# Altium PCB pcb.PcbDoc
Units mil, origin at the board's own origin, x right, y up, seen from the top; angles counter-clockwise.
Board outline 950 x 800 mil, 2 copper layers (Top Layer, Bottom Layer); 25 components, 17 nets, 75 pads, 0 vias.
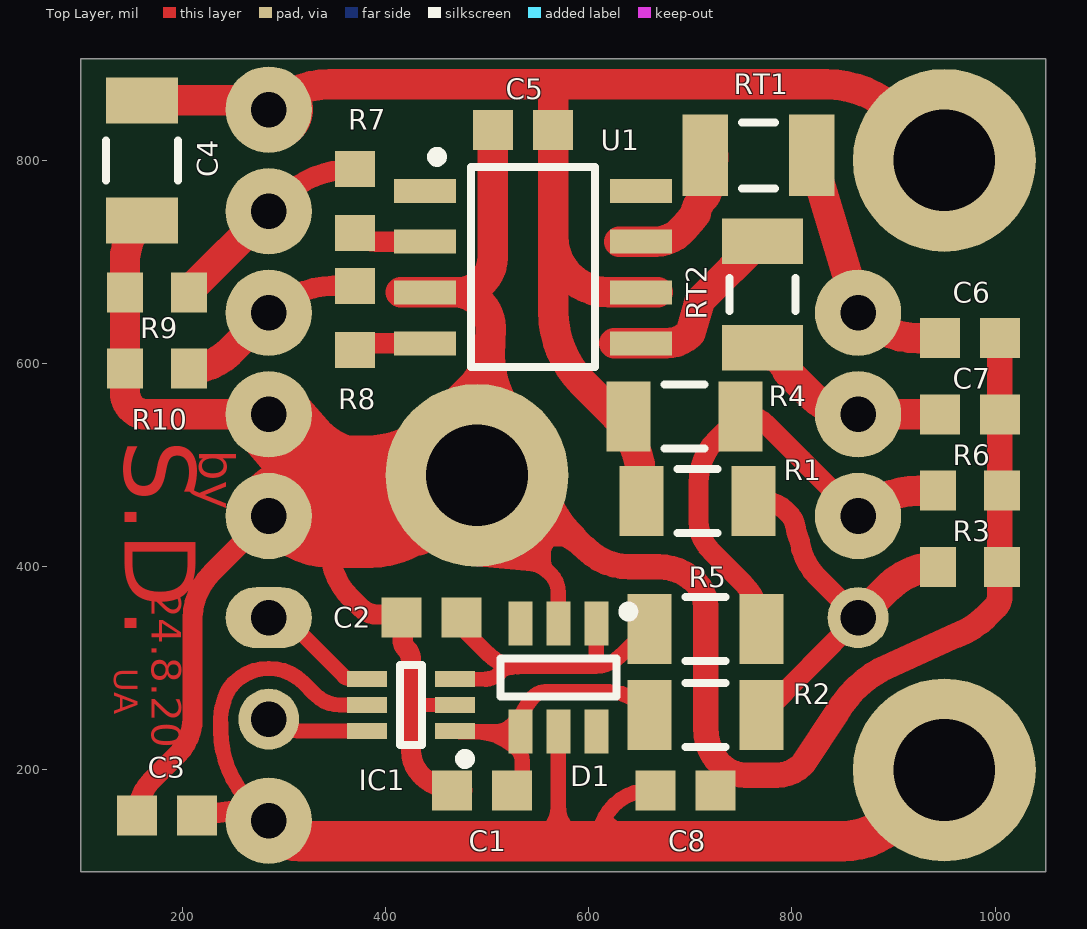
[diagram p0: Top Layer view]
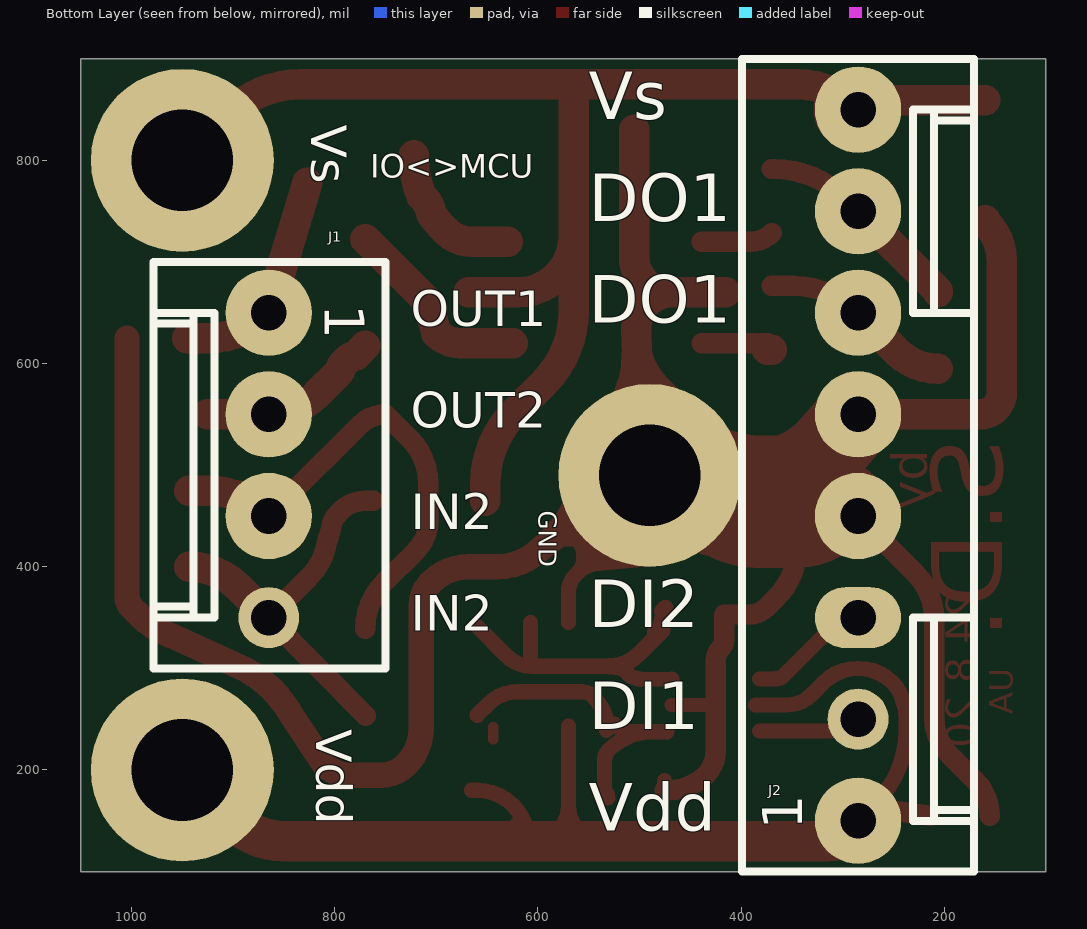
[diagram p1: Bottom Layer view, seen from below]
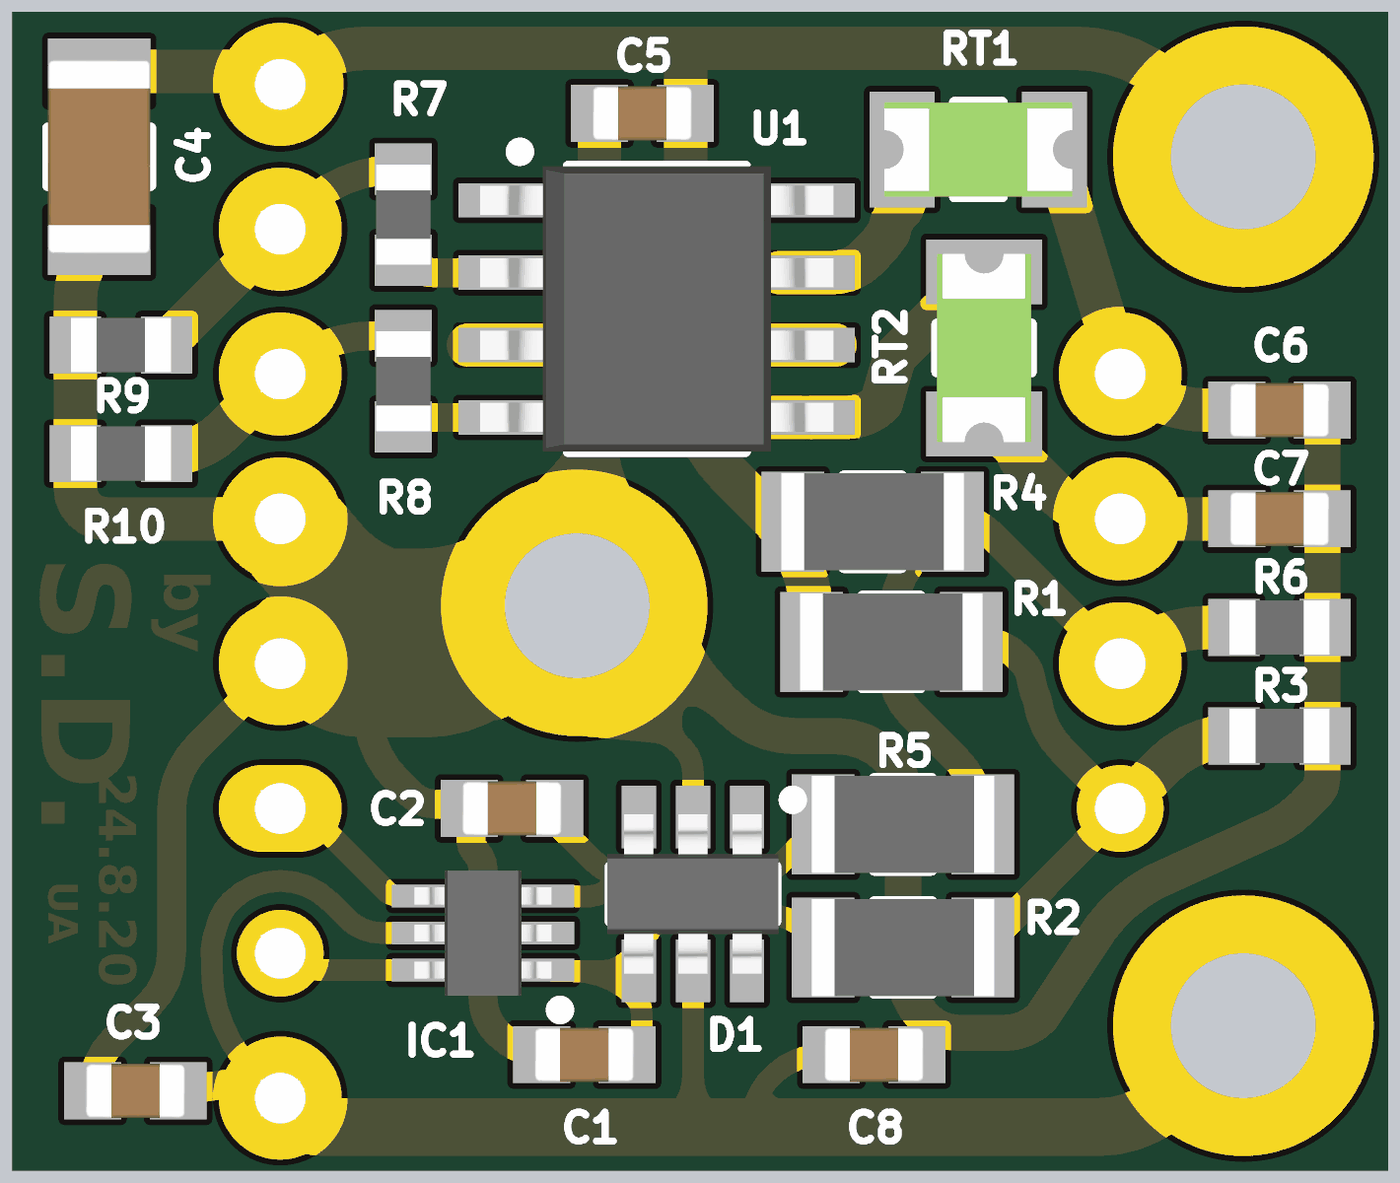
[diagram p2: 3D render of the assembled board from above, using the file's embedded part models]

## Layer stack, top to bottom
Top Solder: solder mask 0.4, Solder Resist, Dk 3.5
Top Layer: signal copper 1.4
Dielectric 1: dielectric 12.6, FR-4, Dk 4.8
Bottom Layer: signal copper 1.4
Bottom Solder: solder mask 0.4, Solder Resist, Dk 3.5

## Board outline
100,100 100,900 1050,900 1050,100

## Design rules (kind name [scope] priority, off if disabled: settings)
Clearance [All] p1: gap=10 ignorepadtopadclearanceinfootprint=FALSE except(9: Arc-SMDPad Track-SMDPad SMDPad-SMDPad)
PolygonConnect [All] p1: connectstyle=Relief reliefconductorwidth=10 reliefentries=4 polygonreliefangle="90 Angle" airgapwidth=10
RoutingVias [All] p1: holewidth=28 width=50 viastyle="Through Hole" minholewidth=28 minwidth=50 maxholewidth=28 maxwidth=50
SolderMaskExpansion [All] p1: expansion=4 istentingtop=FALSE
Width [All] p1: maxlimit=1000 minlimit=10 preferedwidth=10 minimp=50.000000 maximp=50.000000 favimp=50.000000
30 further rules are at their usual default settings.

## Components (designator, comment, footprint, x,y, rotation, side; value= is the part's Value field where it differs from the comment)
C1 "10n" CAPC1608X85N 495,180 r0 top
C2 "10n" CAPC1608X85N 445,350 r0 top
C3 "100n" CAPC1608X85N 185,155 r0 top
C4 "22u" CAPC3216X140N 160,800 r90 top
C5 "100n" CAPC1608X85N 535,830 r0 top
C6 "10n" CAPC1608X85N 975,625 r0 top
C7 "10n" CAPC1608X85N 975,550 r180 top
C8 "100n" CAPC1608X85N 695,180 r180 top
D1 "SRV05-4" SOT95P280X110-6N 570,291 r270 top
IC1 "" SOT65P220X110-6N 425,264 r180 top
J1 "" MOLEX_22-27-2041 865,500 r270 bottom
J2 "" MOLEX_22-27-2081 285,500 r90 bottom
R1 "2k2" RESC3116X65N 707,465 r180 top
R2 "6.8k" RESC3116X65N 715,254 r180 top
R3 "" RESC1608X55N 975,400 r180 top
R4 "2k2" RESC3116X65N 694,548 r180 top
R5 "6.8k" RESC3116X65N 715,339 r180 top
R6 "" RESC1608X55N 975,475 r180 top
R7 "100" RESC1608X55N 370,760 r270 top
R8 "100" RESC1608X55N 370,645 r270 top
R9 "1k" RESC1608X55N 175,670 r0 top
R10 "1k" RESC1608X55N 175,595 r0 top
RT1 "=Value" FUSC_LITTELFUSE_466 767,805 r0 top
RT2 "=Value" FUSC_LITTELFUSE_466 771,668 r270 top
U1 "IR4427STRPBF" SOIC127P600X175-8N 545,695 r0 top

## Footprints (in the part's own frame and the unit in brackets; to place one, negate y for a bottom-side part, rotate by r counter-clockwise, add the part's x,y. Pads: shape width x height; smd on the part's side, far side on the other; paste and mask are expansions set on the pad)
CAPC1608X85N [mm] "Chip Capacitor, Body 1.6x0.8mm IPC Medium Density"
  rect 1x1 smd: 1(-0.75,0) 2(0.75,0)
  body extent -0.87,-0.47 0.88,0.48, height 0.85
CAPC3216X140N [mm] "Chip Capacitor, Body 3.2x1.6mm, IPC Medium Density"
  rect 1.15x1.8 smd: 1(-1.5,0) 2(1.5,0)
  silkscreen extent -0.5,-0.9 0.5,0.9, body extent -1.7,-0.9 1.7,0.9, height 1.4
FUSC_LITTELFUSE_466 [mm] "Very Fast-Acting Surface Mount Thin Film Fuse, Size 1206, Serie 466"
  rect 1.14x2.03 smd: 1(-1.335,0) 2(1.335,0)
  silkscreen extent -0.41,-0.83 0.42,0.83, body extent -1.65,-0.83 1.65,0.83, height 0.66
MOLEX_22-27-2041 [mil] "2.54mm (.100\") Pitch KK® Header, Single Row, Vertical, 4 Circuits"
  round 85 hole 35: 1(-150,0) 2(-50,0) 3(50,0)
  round 60 hole 35: 4(150,0)
  silkscreen extent -200,-113 200,115, body extent -200,-113 200,115, height 461
MOLEX_22-27-2081 [mil] "2.54mm (.100\") Pitch KK® Header, Single Row, Vertical, 8 Circuits"
  round 85 hole 35: 1(-350,0) 4(-50,0) 5(50,0) 6(150,0) 7(250,0) 8(350,0)
  round 60 hole 35: 2(-250,0)
  oval 60x85 hole 35: 3(-150,0)
  silkscreen extent -400,-114 400,114, body extent -400,-114 400,114, height 461
RESC1608X55N [mm] "Chip Resistor, EIA 0603, Metric 1608, Body 1.6x0.8mm, IPC Medium Density"
  rect 0.9x1 smd: 1(-0.8,0) 2(0.8,0)
  body extent -0.87,-0.47 0.88,0.48, height 0.55
RESC3116X65N [mm] "Chip Resistor, EIA 1206, Metric 3116, Body 3.1x1.55mm, IPC Medium Density"
  rect 1.1x1.75 smd: 1(-1.4,0) 2(1.4,0)
  silkscreen extent -0.5,-0.8 0.5,0.8, body extent -1.6,-0.85 1.6,0.85, height 0.65
SOIC127P600X175-8N [mm] "SOIC 8, Pitch 1.27mm - Body 4x5mm, IPC Medium Density"
  rect 1.55x0.6 smd: 1(-2.7,1.905) 2(-2.7,0.635) 3(-2.7,-0.635) 4(-2.7,-1.905) 5(2.7,-1.905) 6(2.7,-0.635) 7(2.7,0.635) 8(2.7,1.905)
  silkscreen extent -2.52,-2.5 1.55,2.88, body extent -3.1,-2.5 3.1,2.5, height 1.75
SOT65P220X110-6N [mm] "SOT363, 0.65mm pitch; 6 pin, 1.25mm W X 2mm L, IPC Medium Density"
  rect 1x0.4 smd: 1(-1.1,0.65) 2(-1.1,0) 3(-1.1,-0.65) 4(1.1,-0.65) 5(1.1,0) 6(1.1,0.65)
  silkscreen extent -1.48,-1 0.28,1.47, body extent -1.2,-1.1 1.2,1.1, height 1.1
SOT95P280X110-6N [mm] "SOT, 0.95mm Pitch; 6 Pin, 1.60mm W X 2.90mm L X 1.10mm H Body, IPC Medium Density"
  rect 1.1x0.6 smd: 1(-1.35,0.95) 2(-1.35,0) 3(-1.35,-0.95) 4(1.35,-0.95) 5(1.35,0) 6(1.35,0.95)
  silkscreen extent -1.77,-1.45 0.48,1.88, body extent -1.4,-1.5 1.4,1.5, height 1.1

## Part data
C1 C2 C3 C4 C5 C6 C7 C8: library part "Capacitor - non polarized", "Non-polarised capacitor"
D1: "RailClamps Low Capacitance TVS Diode Array", Device=SRV05-4
IC1: library part 742G17, "Dual Schmitt-Trigger Buffer"
J1: library part "Connector 4 Male", "Connector 4 Male"
J2: library part "Connector 8 Male", "Connector 8 Male"
R1 R2 R3 R4 R5 R6 R7 R8 R9 R10: library part Resistor, "Resistor"
RT1 RT2: library part "Thermistor PTC", "Thermistor NTC (Positive Temperature Coefficient)"

## Free pads (board coordinates)
  round 180 hole 100: ""(490,490) ""(950,200) ""(950,800)

## Nets (pads, with @x,y where several pads share a name; then routed paths per layer and width w, separated by ;. In a path a pad name is that pad's centre, name@x,y a point inside that pad or via, vN(x,y) a via of type N, cw(c..) or ccw(c..) an arc to the next point about the centre after c; other vN are vias at no path point)
_do1: R7.2 U1.2 | length 71
  Top Layer w20: R7.2 ccw(c390.53,749.03) 390.53,720 U1.2
_do2: R8.2 U1.4 | length 84.1
  Top Layer w20: R8.2 cw(c385.68,597.82) R8.2@375.77,617.66 ; R8.2@375,615 cw(c380,615) R8.2@375.77,617.66 ; R8.2@380,620 ccw(c380,615) R8.2@375.77,617.66 ; U1.4 385.68,620 ccw(c385.68,597.82) R8.2@375.77,617.66
  Top Layer w30: R8.2 373.5,613.5 ccw(c373.5,615) R8.2@375,615
_in1: C1.2 D1.4 IC1.1 R2.2 | length 322.4
  Top Layer w10: R2.2@644,230 R2.2@644,242.31
  Top Layer w15: IC1.1@473.15,237.6 IC1.1@487.51,237.6 ; D1.4@525,245 cw(c507.13,262.87) 507.13,237.6 IC1.1@487.51,237.6 ; C1.2@531.41,172.47 cw(c542.06,172.47) 534.53,180 534.53,209.07 ccw(c519.07,209.07) 530,220 ccw(c487.51,177.51) IC1.1@487.51,237.6 ; D1.4@531.6,240.06 cw(c573.94,240.06) 543.07,269.04 cw(c557.19,260.5) 543.8,270.14 cw(c557.19,260.5) 557.19,277 ; D1.4@532.6,238.85 D1.4@532.6,240.06 ; 558.19,277 619.21,277 cw(c619.21,260.5) 619.84,276.99 cw(c619.21,260.5) 620.01,276.98 620.11,276.98 cw(c620.11,236.43) 648.78,265.1 R2.2
_in2: C2.2 D1.1 IC1.3 R5.2 | length 341.5
  Top Layer w10: R5.2@658.63,339 R5.2
  Top Layer w15: IC1.3 498.88,289.18 ; 498.94,289.59 ccw(c498.94,308.06) 512,295 ; 512,296 cw(c524.08,283.92) 524.08,301 ; 530.08,302 606.53,302 ccw(c606,337.31) 630.97,312.34 R5.2@659.63,341 ; 607.4,304.52 D1.1@607.4,345.15
  Top Layer w16: C2.2 cw(c481.32,350) 476.52,354.8 ccw(c503.84,354.8) C2.2@484.52,335.48 ; C2.2@474.53,359.47 C2.2@477.86,356.14 ; C2.2@477.52,337.48 500.92,314.08 ccw(c530.08,343.25) 530.08,302
_out1: RT1.1 U1.7 | length 147.3
  Top Layer w30: U1.7@630,720 665.86,720 ccw(c665.86,754.14) 690,730 693.15,733.15 ccw(c622.44,803.86) 705.19,747.71 cw(c730.04,745) 714.35,764.47 ccw(c622.44,803.86) 722.44,803.86 RT1.1@722.44,805
_out2: RT2.1 U1.5 | length 196.7
  Top Layer w30: U1.5@625,620 U1.5 675.86,620 ccw(c675.86,654.14) 700,630 709.21,661.77 709.28,661.84 RT2.1@770,722.56
DI1: IC1.6 J2.2 | length 113.8
  Top Layer w15: J2.2 ccw(c312.98,277.98) 312.98,238.41 IC1.6
  Top Layer w20: J2.2 cw(c315.42,219.58) J2.2@296.32,258.13
DI2: IC1.4 J2.3 | length 147.6
  Top Layer w15: J2.3 cw(c285,310.92) 312.63,338.55 359.42,291.77 ccw(c367.2,304.59) 367.2,289.59 IC1.4 ; J2.3@297.43,337.57 J2.3@304.45,330.55
  Top Layer w20: J2.3 ccw(c315.42,380.41) 285.05,349.95 ccw(c315.42,380.41) J2.3@300.09,340.23
DO1: J2.7 R7.1 R9.2 | length 210.2
  Top Layer w20: J2.7 297.21,762.21 cw(c367.92,691.5) 367.92,791.5 R7.1
  Top Layer w30: R9.2 cw(c210.11,670) 207.55,672.55 J2.7
DO2: J2.6 R8.1 R10.2 | length 190.9
  Top Layer w20: J2.6 cw(c348.97,586.03) 348.97,676.5 R8.1
  Top Layer w30: R10.2 ccw(c206.5,651.74) 246.62,611.62 J2.6
GND: C1.1 C2.1 C3.1 C4.1 C5.1 C6.2 C7.1 C8.1 D1.2 IC1.2 J2.4 J2.5 pad.@490,490 R3.1 R6.1 R9.1 R10.1 U1.3 | length 4038.5
  Top Layer w14: 425,263.54 cw(c426.12,262.41) 426.12,264 IC1.2
  Top Layer w15: C1.1@475.47,180 C1.1@475.47,189.45 ; pad.@491.53,407.7 544.67,402.7 cw(c540.73,375.76) 559.9,395.1 ; 560,395 559.9,395.1 ; 562.93,392.07 cw(c545.86,375) 570,375 D1.2@570,345.15 ; 584.99,427.67 566.45,427.67 ccw(c566.45,418.55) 560,425 ccw(c571.94,413.06) 555.05,413.06 555.05,410.11 ; 555.05,406.94 ccw(c571.94,406.94) 559.9,395.1 ; 555.05,406.94 ccw(c571.94,406.94) 559.9,395.1 ; 555.05,406.94 555.05,410.11 ; 555.05,410.11 ccw(c460.23,378.35) 538.96,440 ccw(c460.23,378.35) 530.94,449.06 495.22,484.78 490,490 ccw(c550.36,490) 490.21,484.99 ccw(c550.36,490) 507.68,447.32 515,440 559.9,395.1 ; 559.9,395.1 ccw(c571.94,406.94) 559.94,395.06 ; 559.9,395.1 ccw(c571.94,406.94) 559.94,395.06 ; 559.9,395.1 cw(c540.73,375.76) 559.94,395.06
  Top Layer w20: C3.1 cw(c204.9,155) 169.95,189.95 195.01,215.01 ccw(c158.79,251.21) 210,251.21 210,348.67 cw(c273.57,348.67) 228.62,393.62 J2.4 ; 345.09,419 ccw(c415.31,419) 365.65,369.35 375,360 ccw(c391.77,376.77) 391.77,353.05 C2.1@416.74,353.05 ; C2.1 cw(c419.79,350) C2.1@416.74,353.05 ; C1.1@475.47,180 471.21,180 cw(c471.21,231.21) 435,195 cw(c459.14,219.14) 425,219.14 425,263.54 425,307.93 ccw(c407.93,307.93) 420,320 cw(c427.88,327.88) 416.74,327.88 C2.1@416.74,353.05
  Top Layer w25: J2.4 291.15,443.85 ccw(c327,479.7) 296.72,439.03 ccw(c327,479.7) 327,429 328.44,429 ccw(c328.44,466.56) 355,440 439.83,440 440.18,440 515,440 538.96,440 543.43,440 cw(c543.43,363.79) 584.99,427.67 cw(c543.43,363.79) 597.26,417.74 ; pad.@477.93,485 488.58,485 cw(c488.58,385) 490.21,484.99 cw(c488.58,385) 495.22,484.78 cw(c488.58,385) 559.29,455.71 586.16,428.84 ; pad.@555,498.64 ccw(c648.28,498.64) 582.26,432.74 ; 597.32,417.68 ccw(c640,460.36) 640,400 668.79,400 cw(c668.79,348.79) 705,385 cw(c680.86,360.86) 715,360.86 715,241.21 ccw(c766.21,241.21) 730,205 ccw(c754.14,229.14) 754.14,195 785,195 ccw(c785,231.21) 810.61,205.61 844.51,256.87 cw(c941.57,200) 887.9,298.87 962.19,332.72 ccw(c934.99,407.45) 991.22,351.22 ; 992.44,352.44 999.98,359.98 ccw(c989,370.96) 1004.53,370.96 C7.1 C6.2
  Top Layer w30: C4.1 cw(c157.72,740.94) 159.33,739.33 ccw(c197.54,701.12) 143.5,701.12 R9.1 R10.1 143.5,571.5 ccw(c165,571.5) 165,550 J2.5 ; 315.71,514.29 380.87,514.29 ccw(c380.87,614.29) 451.58,543.58 483,575 ccw(c428.75,629.25) 502.56,608.31 ; U1.3@415,670 U1.3 U1.3@468.47,670 ; 502,592 502.56,608.31 ; C5.1 505.47,705 cw(c470.47,705) 470.47,670 U1.3@468.47,670 ; pad.@531.66,538.34 cw(c601.81,608.48) 502.61,608.48 cw(c428.75,629.25) 502.56,608.31 ; U1.3@468.47,670 cw(c468.47,635) 503.47,635 502.56,608.49 502.56,608.31
  Top Layer w40: J2.4@296.72,439.03 ccw(c345.09,487.39) 345.09,419 385,419 ccw(c385,501.08) 439.83,440 ccw(c385,501.08) pad.@443.04,443.04 ; pad.@431.96,430.9 440.18,440 cw(c514.39,372.97) pad.@443.04,443.04 ; pad.@443.04,443.04 cw(c514.39,372.97) 443.68,443.68 pad.@443.04,443.04
  Top Layer w80: J2.4 290.71,455.71 cw(c361.42,385) 361.42,485 386.42,485 ; J2.5 315.71,514.29 ccw(c386.42,585) 386.42,485 ; pad.@477.93,485 386.42,485
IN1: J1.4 R1.1 R2.1 R3.2 | length 396.4
  Top Layer w20: R1.1 769.86,465 cw(c769.86,430.86) 794,455 797.06,451.94 cw(c778.51,433.38) 799.55,449.06 cw(c783.51,437.11) 803.27,440.23 ccw(c865,450) 804.77,433.31 ccw(c865,450) 807.61,425.24 ccw(c869.77,434) 825.38,389.61 J1.4 R2.1@769.65,253.54
  Top Layer w30: J1.4 894.84,379.84 cw(c943.5,331.19) R3.2
IN2: J1.3 R4.1 R5.1 R6.2 | length 486.9
  Top Layer w20: R5.1 ccw(c705.22,339) 751.11,384.89 720,416 cw(c748.97,444.97) 708,444.97 708,482 cw(c770.48,482) 726.3,526.18 750.12,550 cw(c750.12,514.07) 775.52,539.48 809.06,505.94 cw(c796.77,491.45) 811.26,503.74 J1.3
  Top Layer w30: J1.3 cw(c925.36,389.64) 925.36,475 R6.2
OUT1: C6.1 J1.1 RT1.2 | length 242.1
  Top Layer w30: RT1.2@827,778 J1.1@866,649 ; J1.1@885.12,650 J1.1 865.25,649.75 ccw(c925,709.5) 925,625 C6.1
OUT2: C7.2 J1.2 RT2.2 | length 181
  Top Layer w30: RT2.2@770,617.44 779.08,608.36 cw(c771.77,584.45) 795.68,591.76 817.95,569.49 ccw(c865,616.54) J1.2 925,550
Vdd: C3.2 C8.2 D1.5 IC1.5 J2.1 pad.@950,200 | length 1376.8
  Top Layer w15: J2.1 267.08,167.92 cw(c337.79,238.63) 237.79,238.63 237.79,244.75 cw(c285,250) 240.84,267.5 cw(c277.07,259.64) 250.86,285.86 cw(c285,251.72) 285,300 cw(c285,251.72) 319.14,285.86 330,275 ; 331,274 ccw(c355.14,298.14) 355.14,264 IC1.5@386,264 ; IC1.5 IC1.5@382.59,264 ; 405,120 405,129.97 ; 405,142.07 ccw(c422.07,142.07) 410,130 ; 559.38,139.36 ccw(c533.74,165) 570,165 ; 560,129.98 569.38,139.36 ; D1.5@570,243.09 570,165 ; 580.62,139.37 cw(c606.25,165) 570,165 ; 590.62,139.37 600,129.99 ; 610,129.99 cw(c660.01,129.99) 613.28,147.81 cw(c660.01,129.99) 620,160 cw(c660.01,129.99) 660.01,180 C8.2 ; 616.28,152.81 ccw(c631.92,158.29) 631.92,141.72
  Top Layer w20: C3.2 253.35,160.39 cw(c256.13,140.59) 270.26,154.74 280,145 cw(c285,145) J2.1 ; 408.5,133.61 ccw(c413.61,133.61) 410,130
  Top Layer w40: J2.1@280.01,144.99 ccw(c316.21,181.21) 316.21,130 405,130 410,130 cw(c410,90) 411.42,129.97 430,129.98 560,129.98 569.38,129.98 590.62,129.98 610,129.99 613.28,129.99 631.92,129.99 849.66,130 cw(c850,90) 850,130 ccw(c850,202.43) 901.21,151.21 pad.@950,200
Vs: C4.2 C5.2 J2.8 pad.@950,800 R1.2 R4.2 U1.6 | length 1401.4
  Top Layer w30: C4.2 263.14,859.06 cw(c263.14,828.14) J2.8 cw(c345.36,789.64) 345.36,875 565,875 ; R1.2 651.88,481.7 ccw(c551.88,481.7) 622.59,552.41 594.29,580.71 cw(c665,651.42) 565,651.42 565,725 ; U1.6@668,670 620,670 cw(c620,725) 565,725 ; pad.@950,800 904.29,845.71 ccw(c833.58,775) 833.58,875 565,875 ; 565,725 565,875
  Top Layer w80: J2.8 J2.8@288.79,850
pads on no net: D1.3 D1.6 U1.1 U1.8

## Polygon pours and split planes (outlines as drawn)
no net on Mechanical 16 "NONET_L-01_P-001" (solid): 0,0 1150,0 1150,1000 0,1000

## Other copper
Top Layer:
  text "S.D." at 120,525 h120 r270
  text "by" at 205,515 h60 r270
  text "24.8.20" at 160,375 h50 r270
  text "UA" at 125,300 h40 r270

## Silkscreen, mask and mechanical layers (free items; w line width, h text height)
Bottom Overlay:
  text "Vs" at 835,835 h60 r90
  text "Vs" at 550,825 h80
  text "IO<>MCU" at 765,775 h40
  text "DO1" at 550,725 h80
  text "DO1" at 550,625 h80
  text "OUT1" at 725,625 h60
  text "OUT2" at 725,525 h60
  text "GND" at 605,455 h30 r90
  text "IN2" at 725,425 h60
  text "DI2" at 550,325 h80
  text "IN2" at 725,325 h60
  text "Vdd" at 830,240 h60 r90
  text "DI1" at 550,225 h80
  text "Vdd" at 550,125 h80
Mechanical 1:
  lines w4: 98,98 1052,98 1052,902 98,902 98,98

## Text inside footprints (layer, text, board x,y; h text height)
J1: Mechanical 14 "1" at 810.08,658.27 h39.37 r90; Bottom Overlay "1" at 810.08,658.27 h39.37 r90
J2: Mechanical 14 "1" at 339.92,141.34 h39.37 r270; Bottom Overlay "1" at 339.92,141.34 h39.37 r270